# Altium PCB reciever1_revision.PcbDoc
Units mm, origin at the board's own origin, x right, y up, seen from the top; angles counter-clockwise.
Board outline 32 x 28.25 mm, 2 copper layers (Top Layer, Bottom Layer), stack 1.635 mm thick; 39 components, 24 nets, 131 pads, 40 vias.
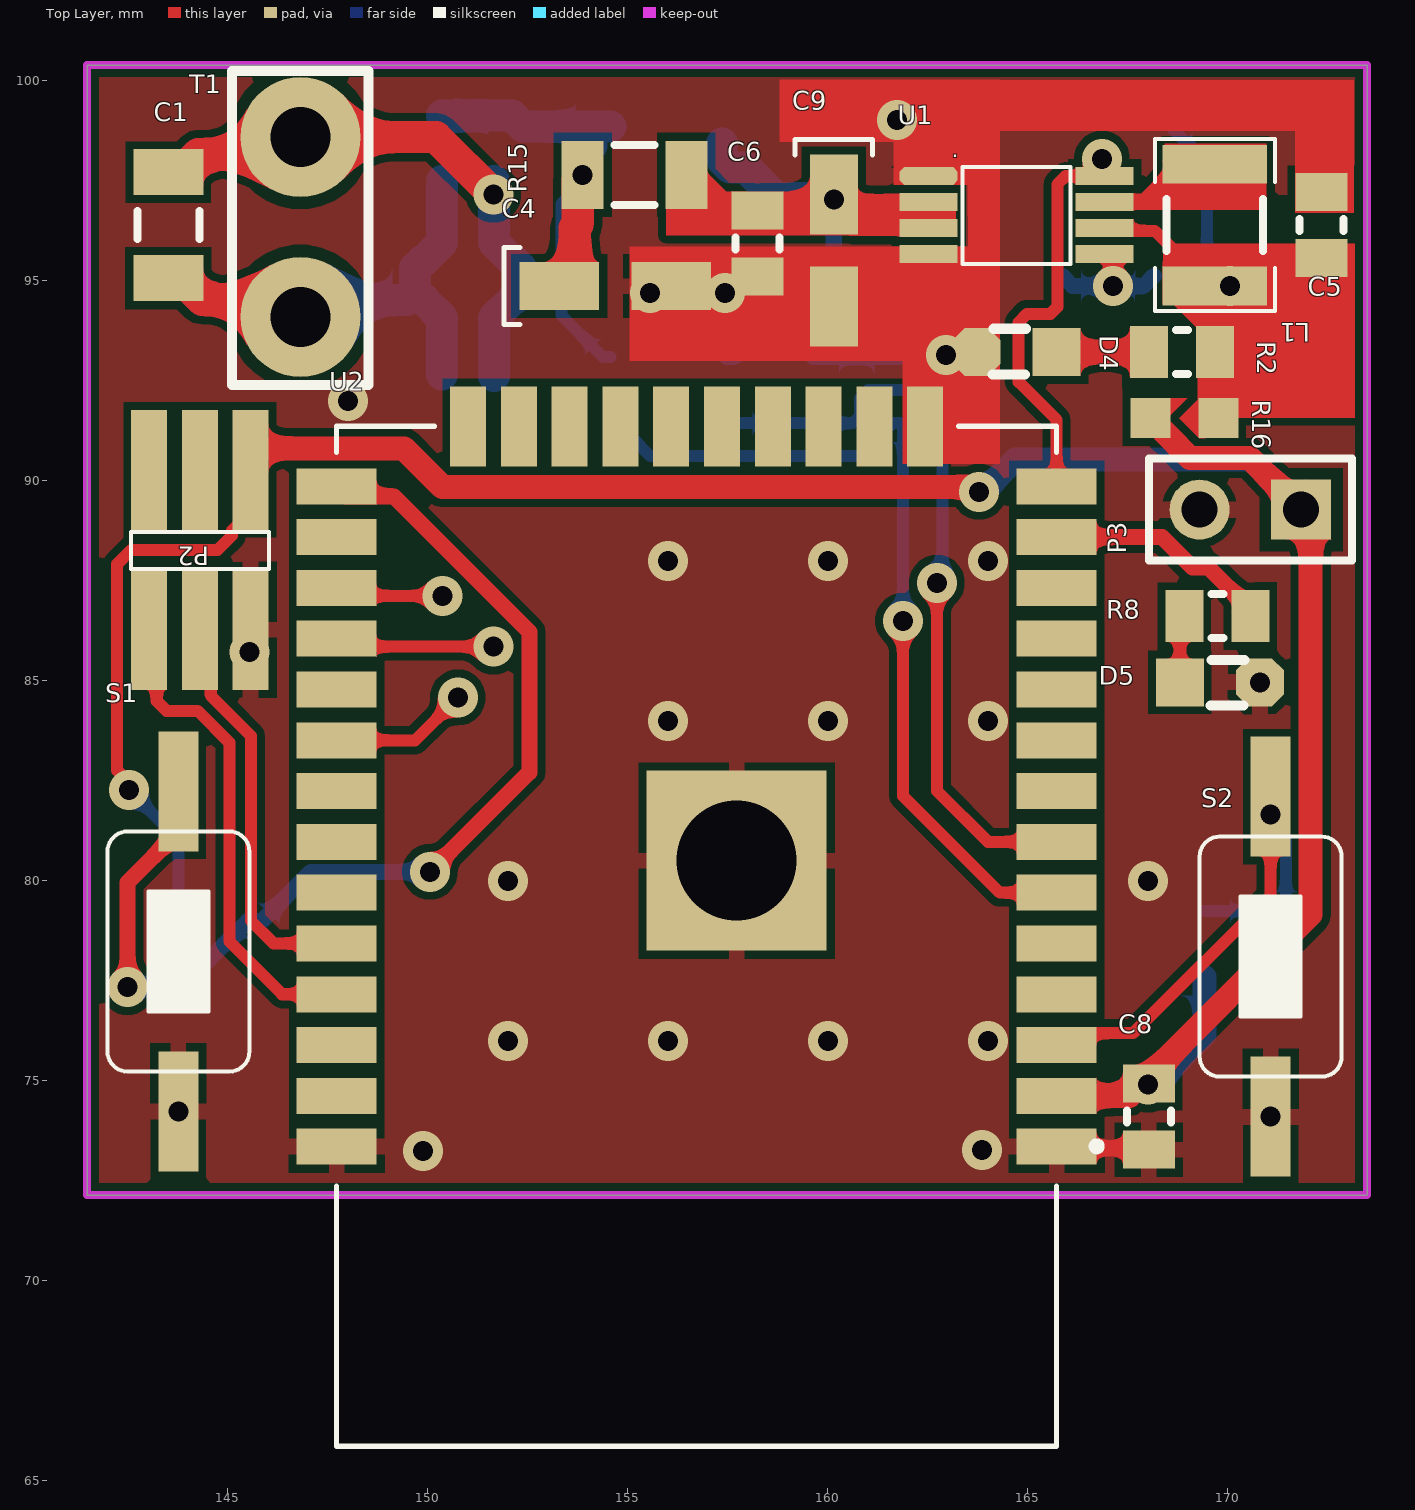
[diagram p0: Top Layer view]
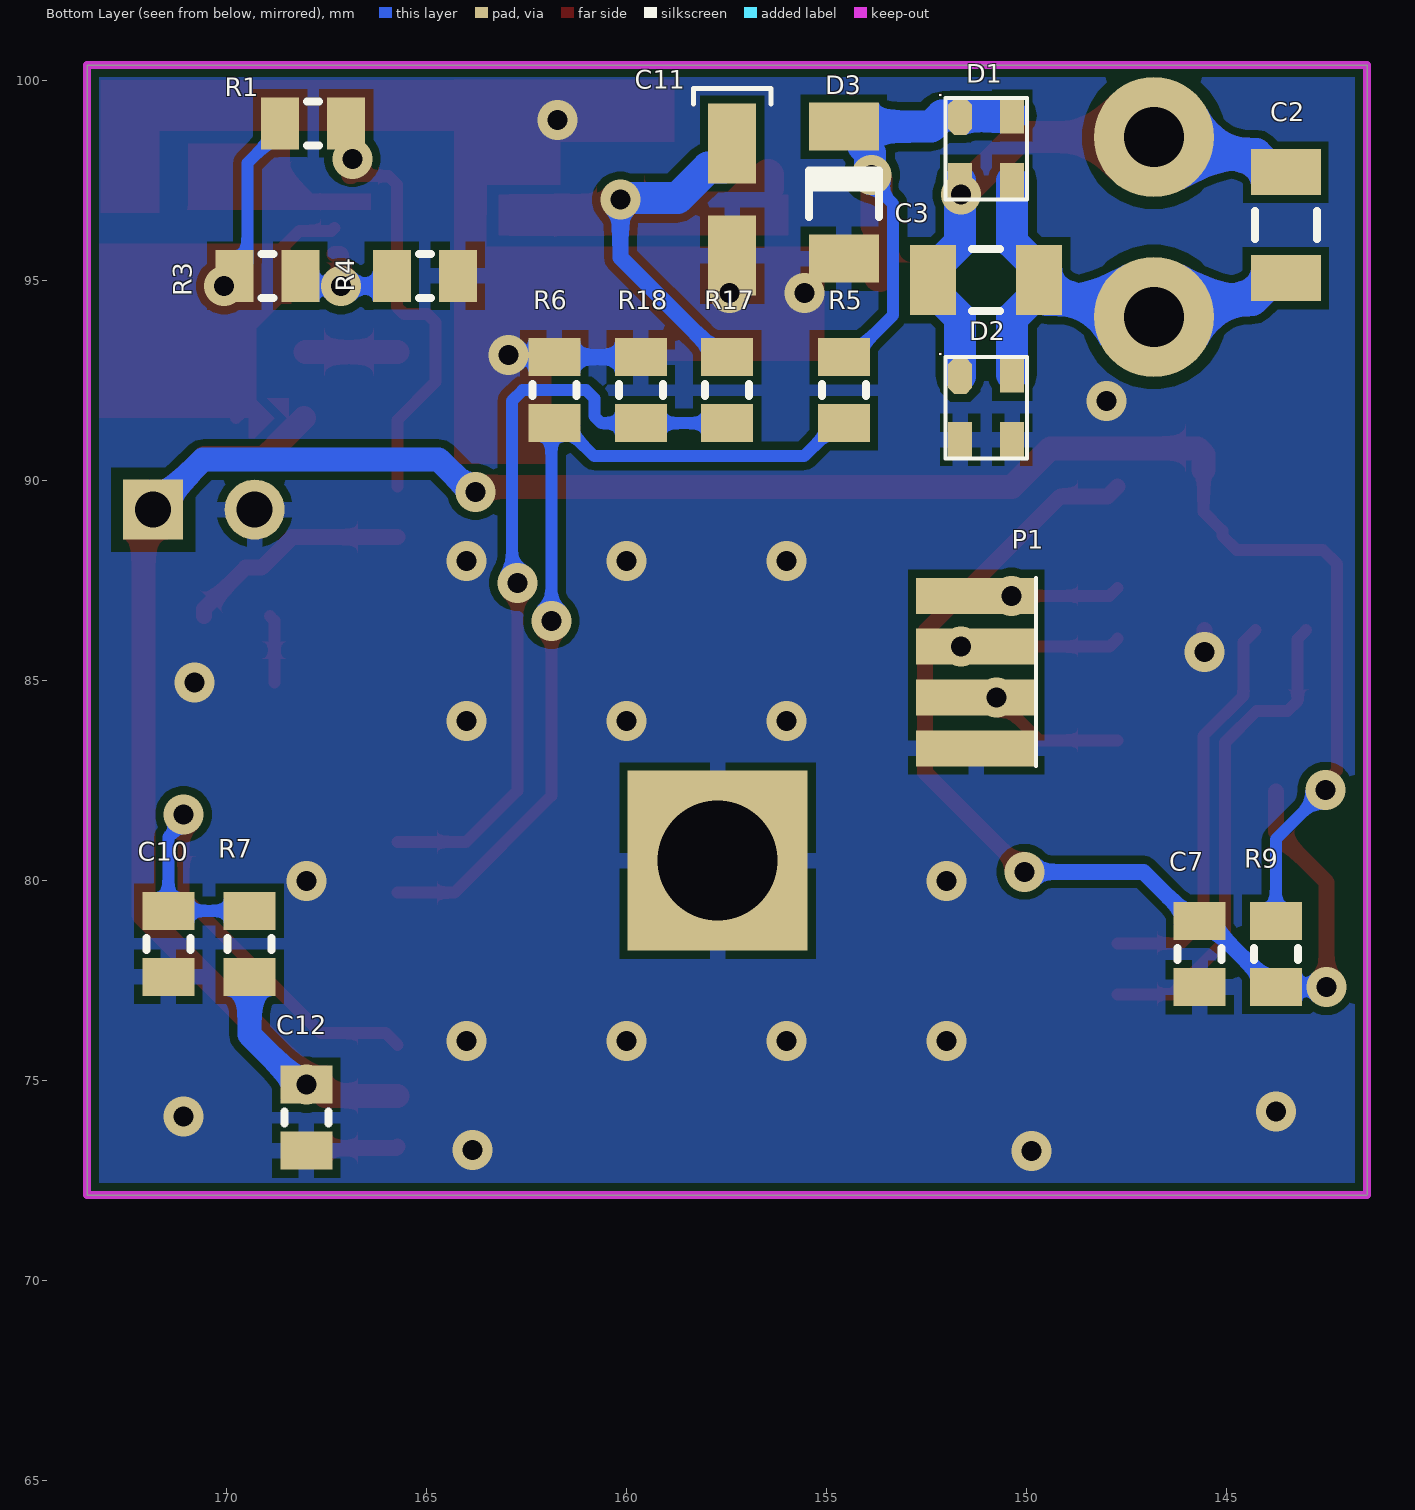
[diagram p1: Bottom Layer view, seen from below]
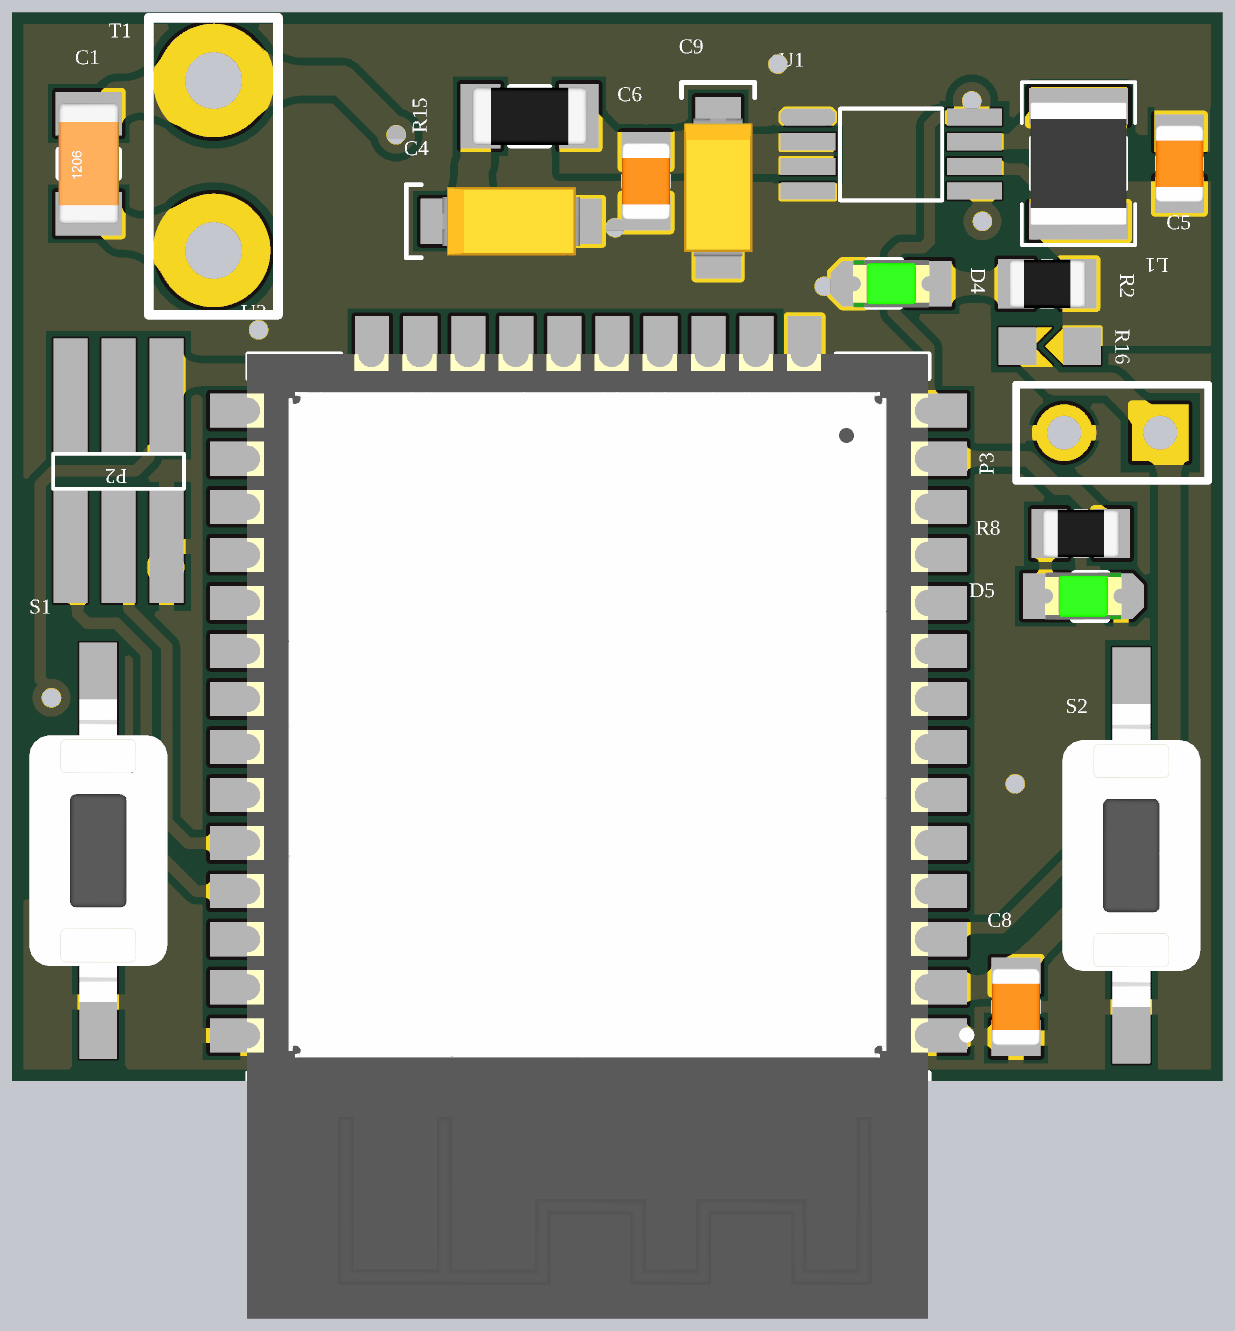
[diagram p2: 3D render of the assembled board from above, using the file's embedded part models]
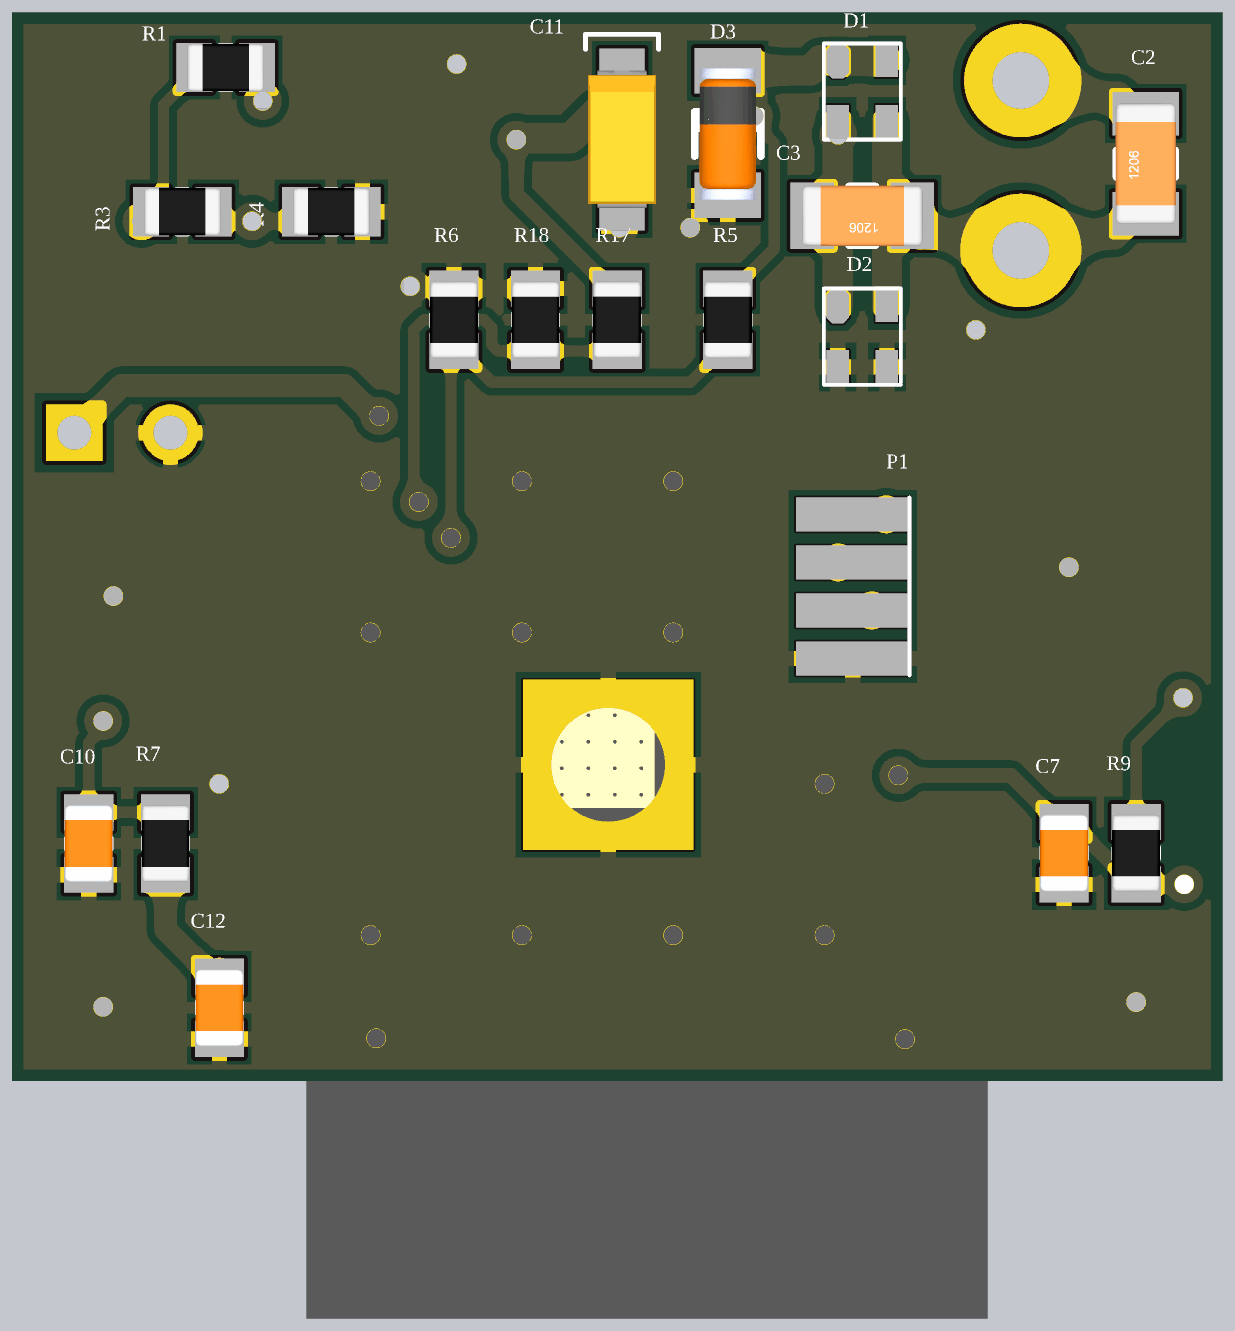
[diagram p3: 3D render of the assembled board from below, using the file's embedded part models]

## Layer stack, top to bottom
Top Solder: solder mask 0.0102, Solder Resist, Dk 3.5
Top Layer: signal copper 0.0175
Dielectric 1: dielectric 1.6, FR-4, Dk 4.8
Bottom Layer: signal copper 0.0175
Bottom Solder: solder mask 0.0102, Solder Resist, Dk 3.5

## Board outline
141.478,72.14 141.478,100.393 173.482,100.393 173.482,72.14

## Design rules (kind name [scope] priority, off if disabled: settings)
Clearance [All] p1: gap=0.2 ignorepadtopadclearanceinfootprint=TRUE except(0: Arc-Hole Track-Hole SMDPad-Hole THPad-Hole Via-Hole Fill-Hole Poly-Hole Region-Hole Text-Hole; 0.254: Arc-Text Track-Text SMDPad-Text THPad-Text Via-Text Fill-Text Poly-Text Region-Text Text-Text; 0.3: THPad-Fill THPad-Poly THPad-Region)
PolygonConnect [All] p1: thpad.connectstyle=Relief thpad.reliefconductorwidth=0.4 thpad.reliefentries=4 thpad.polygonreliefangle="90 Angle" thpad.airgapwidth=0.2 smdpad.connectstyle=Relief smdpad.reliefconductorwidth=0.4 smdpad.reliefentries=4 smdpad.polygonreliefangle="90 Angle" smdpad.airgapwidth=0.2 via.connectstyle=Direct via.reliefconductorwidth=0.254 via.reliefentries=4 via.polygonreliefangle="90 Angle" via.airgapwidth=0.254
RoomDefinition power [InComponentClass('power')] p1 off: confinementstyle=ConfineIn formatcopy=TRUE lockcomponents=FALSE outline 181.356,69.088 237.871,69.088 237.871,98.552 181.356,98.552
RoutingVias [All] p1: holewidth=0.8 width=1.2 viastyle="Through Hole" minholewidth=0.5 minwidth=0.8 maxholewidth=1 maxwidth=1.5
SolderMaskExpansion [All] p1: expansion=0.102 istentingtop=FALSE
Width [All] p1: maxlimit=1 minlimit=0.2 preferedwidth=0.3
30 further rules are at their usual default settings.

## Components (designator, comment, footprint, x,y, rotation, side; value= is the part's Value field where it differs from the comment)
C1 "Cap" "Cap 1206 (3216X15L)" 143.51,96.393 r90 top value=8.2nF
C2 "Cap" "Cap 1206 (3216X15L)" 143.51,96.393 r90 bottom value=4.7nF
C3 "Cap" "Cap 1206 (3216X15L)" 151.003,95.014 r0 bottom value=2.2nF
C4 "Cap tantal" "Cap1206_(3216X18L)Size A" 153.283,94.869 r0 top
C5 "seramic" SMD_CAP_0805 172.339,97.218 r270 top value=22uF
C6 "seramic" SMD_CAP_0805 158.242,95.102 r90 top value=100nF
C7 "seramic" SMD_CAP_0805 145.669,78.993 r270 bottom value=100nF
C8 "seramic" SMD_CAP_0805 168.021,73.28 r90 top value=100nF
C9 "Cap tantal" "Cap1206_(3216X18L)Size A" 160.147,97.155 r270 top
C10 "seramic" SMD_CAP_0805 171.45,79.247 r270 bottom value=100nF
C11 "Cap tantal" "Cap1206_(3216X18L)Size A" 157.353,98.431 r270 bottom
C12 "seramic" SMD_CAP_0805 167.996,73.255 r90 bottom value=22uF
D1 "schotcky diode" UMD4 151.003,98.298 r180 bottom
D2 "schotcky diode" UMD4 151.003,91.821 r180 bottom
D3 "15v zener" "Diode 1n4148 SMD" 154.559,95.553 r90 bottom
D4 "LED1" led_0805 164.72,93.218 r180 top
D5 "LED1" led_0805 169.799,84.963 r0 top
L1 "Inductor" IND1210 169.672,96.393 r270 top value=2.2uH
P1 "Header 4" HEADER-1.27MM-1*4 151.257,85.217 r180 bottom
P2 "Header 3X2" HEADER-1.27MM-SMD-2*3 144.3,88.275 r90 top
P3 "Header 2" HDR1X2 171.831,89.281 r180 top
R1 "Res1" "RES 0805 (2012X06L)" 168.656,98.933 r180 bottom value=100K
R2 "Res1" "RES 0805 (2012X06L)" 169.672,93.218 r180 top value=4.7K
R3 "Res1" "RES 0805 (2012X06L)" 169.798,95.123 r180 bottom value=47K
R4 "Res1" "RES 0805 (2012X06L)" 165.861,95.123 r180 bottom value=15K
R5 "Res1" "RES 0805 (2012X06L)" 154.559,93.09 r270 bottom value="88.7K 0.1%"
R6 "Res1" "RES 0805 (2012X06L)" 161.798,91.44 r90 bottom value="19.6K 0.1%"
R7 "Res1" "RES 0805 (2012X06L)" 169.418,77.597 r90 bottom value=15K
R8 "Res1" "RES 0805 (2012X06L)" 170.56,86.614 r180 top value=4.7K
R9 "Res1" "RES 0805 (2012X06L)" 143.764,77.343 r90 bottom value=10K
R15 "Res1" "RES 1206 (3216X08L)" 153.868,97.648 r0 top value="1R 1% 250mw"
R16 "jumper" JUMPER 168.91,91.567 r180 top value=0
R17 "Res1" "RES 0805 (2012X06L)" 157.48,93.091 r270 bottom value="88.7K 0.1%"
R18 "Res1" "RES 0805 (2012X06L)" 159.639,91.44 r90 bottom value="19.6K 0.1%"
S1 "Switch PB" TACK-SW-3X5X6 143.764,78.232 r90 top locked
S2 "Switch PB" TACK-SW-3X5X6 171.069,78.105 r90 top locked
T1 "Terminal" my-term 146.812,96.266 r90 top
U1 "TPS62160" DGK-PDSO-G8 164.719,96.647 r270 top
U2 "esp 32 wroom d" esp-wroom 156.718,78.613 r180 top locked

## Footprints (in the part's own frame and the unit in brackets; to place one, negate y for a bottom-side part, rotate by r counter-clockwise, add the part's x,y. Pads: shape width x height; smd on the part's side, far side on the other; paste and mask are expansions set on the pad)
"Cap1206_(3216X18L)Size A" [mm] "Chip Capacitor, 2-Leads, Body 3.2x1.6mm, IPC High Density, chip Tantalum"
  rect 1.999x1.199 smd: 1(0,0) 2(2.8,0)
  silkscreen extent -1.38,-0.97 -0.99,0.97, body extent -0.43,-0.9 3.21,0.9, height 1.8
"Cap 1206 (3216X15L)" [mm] "Chip Capacitor, 2-Leads, Body 3.2x1.6mm, IPC High Density"
  rect 1.15x1.75 smd: 1(-1.325,0) 2(1.325,0)
  silkscreen extent -0.35,-0.77 0.35,0.77, body extent -1.6,-0.8 1.6,0.8, height 1
DGK-PDSO-G8 [mm]
  oct 0.45x1.45 smd mask+0.05: 1(-0.975,-2.2)
  rect 0.45x1.45 smd mask+0.05: 2(-0.325,-2.2) 3(0.325,-2.2) 4(0.975,-2.2) 5(0.975,2.2) 6(0.325,2.2) 7(-0.325,2.2) 8(-0.975,2.2)
  silkscreen extent -1.2,-1.35 1.22,1.35, body extent -1.2,-1.35 1.22,1.35, height 1
"Diode 1n4148 SMD" [mm] "Mini MELF SOD-80"
  rect 1.2x1.75 smd: 1(0,0) 2(3.3,0)
  silkscreen extent 1.04,-0.87 2.22,0.88, body extent -0.13,-0.75 3.37,0.75, height 1.55
esp-wroom [mm]
  rect 2x0.9 smd: 1(-9,5.26) 2(-9,3.99) 3(-9,2.72) 4(-9,1.45) 5(-9,0.18) 6(-9,-1.09) 7(-9,-2.36) 8(-9,-3.63) 9(-9,-4.9) 10(-9,-6.17) 11(-9,-7.44) 12(-9,-8.71) 13(-9,-9.98) 14(-9,-11.25) 25(9,-11.25) 26(9,-9.98) 27(9,-8.71) 28(9,-7.44) 29(9,-6.17) 30(9,-4.9) 31(9,-3.63) 32(9,-2.36) 33(9,-1.09) 34(9,0.18) 35(9,1.45) 36(9,2.72) 37(9,3.99) 38(9,5.26)
  rect 0.9x2 smd: 15(-5.715,-12.75) 16(-4.445,-12.75) 17(-3.175,-12.75) 18(-1.905,-12.75) 19(-0.635,-12.75) 20(0.635,-12.75) 21(1.905,-12.75) 22(3.175,-12.75) 23(4.445,-12.75) 24(5.715,-12.75)
  rect 4.5x4.5 hole 3 mask+0.05: 39(-1,-1.89)
  silkscreen extent -10.1,-12.75 9,12.75, body extent -8.98,-12.75 9.02,12.75, height 3.25
HDR1X2 [mm] "Connector; Header; 2 Position"
  rect 1.5x1.5 hole 0.9: 1(0,0)
  round 1.5 hole 0.9: 2(2.54,0)
  silkscreen extent -1.27,-1.27 3.81,1.27
HEADER-1.27MM-1*4 [mm]
  rect 3x0.9 smd mask+0.05: 1(0,1.905) 2(0,0.635) 3(0,-0.635) 4(0,-1.905)
  silkscreen extent 1.5,-2.35 1.5,2.35
HEADER-1.27MM-SMD-2*3 [mm]
  rect 3x0.9 smd mask+0.05: 1(-2,1.27) 2(2,1.27) 3(-2,0) 4(2,0) 5(-2,-1.27) 6(2,-1.27)
  silkscreen extent -0.48,-1.73 0.45,1.73
IND1210 [mm] "Chip Inductor, 2-Leads, Body 3/20x2/50mm, IPC Medium Density DESIGNER:ABBAS BASEREH"
  rect 0.97x2.62 smd: 1(-1.52,0) 2(1.52,0)
  silkscreen extent -2.15,-1.5 2.15,1.5, body extent -1.63,-1.28 1.63,1.28, height 0.55
JUMPER [mm]
  rect 1x1 smd mask+0.05: 1(-0.85,0) 2(0.85,0)
  Top Layer region: 0.475,0.5 -0.075,0.5 0.475,-0.05
  Top Layer region: 0.475,0.05 0.475,-0.5 -0.075,-0.5
  Top Layer region: -0.375,0.5 0.125,0 -0.375,-0.5 -0.525,-0.5 -0.525,0.5
led_0805 [mm]
  rect 1.2x1.2 smd: 1(-1,0)
  oct 1.2x1.2 smd: 2(1,0)
  silkscreen extent -0.23,-0.58 0.61,0.56, body extent -1.01,-0.63 1.01,0.62, height 1.1
my-term [mm]
  round 3 hole 1.5: 1(-2.168,0) 2(2.325,0)
  silkscreen extent -3.87,-1.7 3.98,1.71
"RES 0805 (2012X06L)" [mm] "Chip Resistor, 2-Leads, Body 2.0x1.3mm, IPC High Density _ (0.100 W)"
  rect 0.95x1.3 smd: 1(0,0) 2(1.65,0)
  silkscreen extent 0.67,-0.55 0.97,0.55, body extent -0.19,-0.63 1.84,0.64, height 0.6
"RES 1206 (3216X08L)" [mm] "Chip Resistor, 2-Leads, Body 3.2x1.6mm, IPC High Density _ (0.125 W)"
  rect 1.05x1.7 smd: 1(0,0) 2(2.596,0)
  silkscreen extent 0.8,-0.75 1.8,0.75, body extent -0.23,-0.76 2.82,0.76, height 0.6
SMD_CAP_0805 [mm]
  rect 0.95x1.3 smd: 1(0,0) 2(1.65,0)
  silkscreen extent 0.67,-0.55 0.97,0.55, body extent -0.19,-0.63 1.84,0.63, height 0.65
TACK-SW-3X5X6 [mm]
  rect 3x1 smd mask+0.05: 1(-4,0) 2(4,0)
  silkscreen extent -3,-1.78 3,1.78, body extent -4,-1.75 4,1.75, height 4.3
UMD4 [mm]
  oct 0.6x0.9 smd mask+0.05: 1(-0.65,0.8)
  rect 0.6x0.9 smd mask+0.05: 2(-0.65,-0.8) 3(0.65,-0.8) 4(0.65,0.83)
  silkscreen extent -1.02,-1.27 1.02,1.27, body extent -1.05,-0.43 1.05,0.5, height 1

## Part data
C1 C2 C3: "Capacitor", LatestRevisionDate=17-Jul-2002, LatestRevisionNote="Re-released for DXP Platform.", PackageDescription="Radial Cap, Thru-Hole; 2 Leads; 0.3 in Pin Spacing", PackageReference=RAD-0.3, Published=8-Jun-2000, Publisher="Altium Limited"
C4 C9 C11: library part "Cap electrolitic radial 10x21", Data=16-12-2016, Designer="Abbas Basereh", Part. No=22U/25V
C5 C6 C7 C8 C10 C12: library part Cap, "Capacitor", LatestRevisionDate=17-Jul-2002, LatestRevisionNote="Re-released for DXP Platform.", PackageDescription="Radial Cap, Thru-Hole; 2 Leads; 0.3 in Pin Spacing", PackageReference=RAD-0.3, Published=8-Jun-2000, Publisher="Altium Limited"
D1 D2: library part RB481
D3: library part "D Zener", "Zener Diode", LatestRevisionDate=17-Jul-2002, LatestRevisionNote="Re-released for DXP Platform.", PackageDescription="Diode, Thru-Hole; 2 Leads; 0.7 in Pin Spacing", PackageReference=DIODE-0.7, Published=8-Jun-2000, Publisher="Altium Limited"
D4 D5: "Typical RED GaAs LED", LatestRevisionDate=08-Jul-2005, LatestRevisionNote="Mech Layer 1 removed.", PackageDescription="LED; 2 Leads", PackageReference=LED-1, Published=8-Jun-2000, Publisher="Altium Limited"
P1: "Header, 4-Pin", LatestRevisionDate=17-Jul-2002, LatestRevisionNote="Re-released for DXP Platform.", Publisher="Altium Limited"
P2: "Header, 3-Pin, Dual row", LatestRevisionDate=17-Jul-2002, LatestRevisionNote="Re-released for DXP Platform.", Publisher="Altium Limited"
P3: "Header, 2-Pin", LatestRevisionDate=17-Jul-2002, LatestRevisionNote="Re-released for DXP Platform.", Publisher="Altium Limited"
R1 R2 R3 R4 R5 R6 R7 R8 R9 R15 R17 R18: "Resistor", LatestRevisionDate=17-Jul-2002, LatestRevisionNote="Re-released for DXP Platform.", PackageDescription="Axial Device, Thru-Hole; 2 Leads; 0.3 in Pin Spacing", PackageReference=AXIAL-0.3, Published=8-Jun-2000, Publisher="Altium Limited"
R16: library part Res1, "Resistor", LatestRevisionDate=17-Jul-2002, LatestRevisionNote="Re-released for DXP Platform.", PackageDescription="Axial Device, Thru-Hole; 2 Leads; 0.3 in Pin Spacing", PackageReference=AXIAL-0.3, Published=8-Jun-2000, Publisher="Altium Limited"
S1 S2: "Push Button Switch"
T1: library part "Terminal 1*2", "Terminal 2 Pin 250VAC 16A", ComponentLinkURL=www.picpars.com, Designer="Seyed Mohsen Ghasemain", E-mail=picpars@gmail.com
U2: library part ESP32-wroom
L1: Code_IEC=1005, Code_JEITA=0402, LatestRevisionDate=29-May-2009, LatestRevisionNote="IPC-7351 Footprint Added.", PackageDescription="Chip Inductor", PackageReference=0402-A, Published=8-Jun-2000, Publisher="Altium Limited"

## Via types
v1: diameter 1, hole 0.5, Top Layer to Bottom Layer, tented both sides, 40 vias

## Nets (pads, with @x,y where several pads share a name; then routed paths per layer and width w, separated by ;. In a path a pad name is that pad's centre, name@x,y a point inside that pad or via, vN(x,y) a via of type N, cw(c..) or ccw(c..) an arc to the next point about the centre after c; other vN are vias at no path point)
3v3: C8.2 C12.2 P2.6 P3.1 R7.1 R9.2 R16.2 U2.2 | length 68.6
  Top Layer w0.3: v1(142.525,82.275) 142.525,82.464 142.23,82.759 142.23,87.92 142.585,88.275 144.745,88.275 145.1,88.63 145.1,88.755 145.57,89.225 P2.6
  Top Layer w0.6: P2.6 145.57,90.663 145.72,90.813 149.396,90.813 150.359,89.85 163.65,89.85 v1(163.775,89.725) ; U2.2 C8.2@167.539,74.623 ; C8.2@167.933,75.018 172.069,79.153 172.069,89.043 P3.1 170.545,90.567 169.053,90.567 168.684,90.936 168.684,90.943 R16.2
  Bottom Layer w0.3: v1(142.525,82.275) 143.764,81.036 R9.2
  Bottom Layer w0.6: v1(163.775,89.725) 163.883,89.725 164.689,90.531 170.581,90.531 P3.1 ; v1(167.996,74.905) 168.171,74.905 169.418,76.152 R7.1
3v3_reg: C5.2 L1.2 R1.1 R2.1 R3.1 R16.1 U1.6 | length 13.4
  Top Layer w0.3: U1.6@167.3,96.322 167.375,96.247 168.17,96.247 169.386,95.031 L1.2@169.56,95.031 ; L1.2@169.672,94.869 R2.1 169.672,91.655 R16.1 ; v1(170.053,94.869) 170.493,94.869 171.192,95.568 C5.2
  Bottom Layer w0.3: R1.1 168.656,98.758 169.473,97.941 169.473,95.449 v1(170.053,94.869)
AC1: C1.2 C2.2 C3.2 D1.2 D2.1 T1.2 | length 18.2
  Top Layer w0.8: C1.2 143.81,97.718 144.262,98.17 146.391,98.17 T1.2 150.202,98.591 v1(151.638,97.155)
  Bottom Layer w0.8: C2.2 143.81,97.718 144.262,98.17 146.391,98.17 T1.2 ; D2.1 151.653,94.07 152.122,94.539 152.153,94.539 152.328,94.714 C3.2 152.328,95.314 152.153,95.489 152.122,95.489 151.653,95.958 D1.2
AC2: C1.1 C2.1 C3.1 D1.3 D2.4 T1.1 | length 16
  Top Layer w0.8: C1.1 143.81,95.068 144.359,94.519 146.391,94.519 T1.1
  Bottom Layer w0.8: C2.1 143.81,95.068 144.359,94.519 146.391,94.519 T1.1 147.233,94.519 149.483,94.519 C3.1@149.678,94.714 ; D2.4 150.353,94.07 149.884,94.539 149.853,94.539 C3.1@149.678,94.714 ; D1.3 150.353,95.958 149.884,95.489 149.853,95.489 149.678,95.314 C3.1 C3.1@149.678,94.714
EN: C10.1 R7.2 S2.2 U2.3 | length 13.5
  Top Layer w0.3: U2.3 166.018,76.193 167.633,76.193 171.069,79.629 v1(171.069,81.661)
  Bottom Layer w0.3: R7.2 C10.1 171.45,81.091 171.069,81.472 v1(171.069,81.661)
GND: C4.2 C5.1 C6.1 C7.2 C8.1 C9.2 C10.2 C11.2 C12.1 D2.2 D2.3 D3.1 D4.2 D5.2 P1.4 P2.5 P3.2 R4.2 R6.2 R18.2 S1.1 S2.1 U1.1 U1.4 U2.1 U2.15 U2.38 U2.39 | length 6.2
  Top Layer w0.4: v1(145.542,85.725) P2.5@145.542,86.265 ; U2.1 165.754,73.317 167.985,73.317 C8.1
  Bottom Layer w0.4: R18.2 R6.2 161.828,93.12 162.92,93.12 v1(162.95,93.15)
  other v1: 149.875,73.25 163.85,73.275 171.069,74.105 143.764,74.232 152,76 156,76 160,76 164,76 152,80 168,80 156,84 160,84 164,84 170.799,84.963 156,88 160,88 164,88 148,92 155.55,94.7 157.425,94.7 161.725,99.025
IO0: C7.1 R9.1 S1.2 U2.25 | length 27.6
  Top Layer w0.4: v1(142.494,77.343) 142.494,79.962 143.764,81.232 S1.2 ; U2.25 147.968,89.613 149.15,89.613 152.538,86.225 152.538,82.713 v1(150.05,80.225)
  Bottom Layer w0.4: v1(142.494,77.343) 143.939,77.343 144.214,77.618 144.214,77.713 145.494,78.993 C7.1 145.844,78.993 147.076,80.225 v1(150.05,80.225)
IO16: P1.1 U2.27 | length 2.7
  Top Layer w0.3: U2.27 147.919,87.122 v1(150.368,87.122)
IO17: P1.2 U2.28 | length 4
  Top Layer w0.3: U2.28 147.919,85.852 v1(151.638,85.852)
IO18: P1.3 U2.30 | length 3.5
  Top Layer w0.3: U2.30 149.68,83.513 v1(150.749,84.582)
led: R8.1 U2.13 | length 5.8
  Top Layer w0.4: U2.13 168.353,88.593 169.117,87.828 169.521,87.828 170.56,86.789 R8.1
LSK: U2.26
NetD4_1: D4.1 R2.2 | length 2.3
  Top Layer w0.6: D4.1 R2.2
NetD5_1: D5.1 R8.2 | length 1.7
  Top Layer w0.3: D5.1 168.799,86.503 R8.2
NetL1_1: L1.1 U1.7 | length 3.1
  Top Layer w0.4: U1.7 166.925,96.978 167.912,96.978 168.847,97.913 L1.1
NetR3_2: R3.2 R4.1 U1.5 | length 3.5
  Top Layer w0.4: v1(167.132,94.869) 167.132,95.647 167.157,95.672 U1.5@167.3,95.672
  Bottom Layer w0.4: R4.1 166.115,94.869 167.894,94.869 R3.2
PG: R1.2 U1.8 U2.14 | length 10.4
  Top Layer w0.3: U2.14 165.718,91.525 164.77,92.473 164.77,93.963 164.975,94.168 165.559,94.168 165.735,94.344 165.735,97.409 165.94,97.614 166.911,97.614 U1.8
  Top Layer w0.4: v1(166.85,98.05) 166.85,97.647 166.875,97.622 U1.8
RXD: P2.3 U2.34 | length 10.2
  Top Layer w0.3: P2.3@144.272,86.265 144.572,85.965 144.572,84.626 145.573,83.626 145.573,79.002 146.142,78.433 U2.34
TXD: P2.1 U2.35 | length 12.3
  Top Layer w0.3: P2.1@143.002,86.265 143.218,86.049 143.218,84.495 143.465,84.248 144.242,84.248 145.034,83.457 145.034,78.486 146.357,77.163 U2.35
Vrec: C4.1 D1.1 D1.4 D3.2 R5.1 R15.1 | length 13.7
  Top Layer w0.8: C4.1@153.67,95.123 153.67,96.325 153.743,96.398 153.743,97.523 v1(153.868,97.648)
  Bottom Layer w0.3: v1(153.868,97.648) 153.868,97.459 153.334,96.925 153.334,94.14 154.384,93.09 R5.1
  Bottom Layer w0.8: D1.4 152.106,99.128 152.381,98.853 D3.2@154.284,98.853 ; v1(153.868,97.648) 153.906,97.687 153.906,98.2 154.084,98.378 154.084,98.653 D3.2@154.284,98.853 ; D3.2 D3.2@154.284,98.853
Vrec1: C6.2 C9.1 C11.1 R15.2 R17.1 U1.2 U1.3 | length 18.8
  Top Layer w0.4: C9.1@159.948,96.827 160.075,96.827 160.58,96.322 U1.3@162.9,96.322 ; C9.1@160.202,96.972 U1.2 U1.2@162.9,96.972
  Top Layer w0.5: v1(160.147,97.027) C9.1@160.202,96.972
  Top Layer w0.8: R15.2 156.464,97.323 156.589,97.198 156.914,97.198 157.285,96.827 158.167,96.827 C6.2 158.317,96.827 C9.1@159.948,96.827
  Bottom Layer w0.4: R17.1 157.655,93.091 160.147,95.583 v1(160.147,97.027)
  Bottom Layer w0.8: C11.1 157.353,98.031 157.552,97.831 157.952,97.831 158.719,97.065 160.109,97.065 v1(160.147,97.027)
Vsen1: R5.2 R6.1 U2.6 | length 22.1
  Top Layer w0.3: v1(161.875,86.5) 161.875,82.125 164.297,79.703 U2.6
  Bottom Layer w0.3: R5.2 154.734,91.44 155.559,90.615 160.798,90.615 161.623,91.44 R6.1 161.875,91.363 v1(161.875,86.5)
Vsen2: R17.2 R18.1 U2.7 | length 19.4
  Top Layer w0.3: v1(162.725,87.45) 162.725,82.25 164.002,80.973 U2.7
  Bottom Layer w0.3: R17.2 R18.1 160.622,91.44 160.798,91.616 160.798,92.06 161.003,92.265 162.593,92.265 162.859,91.999 162.859,87.584 v1(162.725,87.45)
Zero_cross: U2.16
pads on no net: P2.2 P2.4 U2.4 U2.5 U2.8 U2.9 U2.10 U2.11 U2.12 U2.17 U2.18 U2.19 U2.20 U2.21 U2.22 U2.23 U2.24 U2.29 U2.31 U2.32 U2.33 U2.36 U2.37

## Polygon pours and split planes (outlines as drawn)
GND on Top Layer "GND_L01_P000" (solid, remove dead copper, pour order 0): 141.55,100.25 141.575,100.275 173.475,100.275 173.475,72.025 173.425,72.075 141.375,72.075
GND on Bottom Layer "GND_L02_P001" (solid, remove dead copper, pour order 1): 141.7,100.3 141.725,100.325 173.625,100.325 173.625,72.075 173.575,72.125 141.525,72.125

## Keep-outs
Keep-Out Layer:
  the board outline again, w0.2

## Other copper
Top Layer:
  rectangle net GND: 171.675,96.7 173.15,100.025
  rectangle net GND: 164.125,98.75 173.15,100.025
  region net 3v3_reg: 168.375,95.35 168.375,94.425 168.625,94.425 169.25,93.8 169.25,91.575 173.175,91.575 173.175,95.925 168.4,95.925
  pour cut-out: 168.416,97.175 168.441,97.15 173.15,97.15 173.15,95.35 168.375,95.35
  region net GND: 163.506,95.85 155.05,95.85 155.05,93 161.875,93 161.875,90.425 164.3,90.425 164.3,100.025 158.8,100.025 158.8,98.475 161.65,98.475 161.65,97.4 163.494,97.4
  region net NetL1_1: 166.384,96.774 170.975,96.774 170.956,96.901 170.956,98.425 168.416,98.425 168.416,97.175 166.384,97.175
  region net Vrec1: 163.195,97.155 163.195,96.139 155.956,96.139 155.956,97.155

## Text inside footprints (layer, text, board x,y; h text height)
U2: Mechanical 13 "ANTENNA" at 162.718,69.613 h1 r180